# Altium PCB sdram_rev.PcbDoc
Units mm, origin at the board's own origin, x right, y up, seen from the top; angles counter-clockwise.
Board outline 29.59 x 50.8 mm, 2 copper layers (Top Layer, Bottom Layer); 10 components, 42 nets, 131 pads, 27 vias.
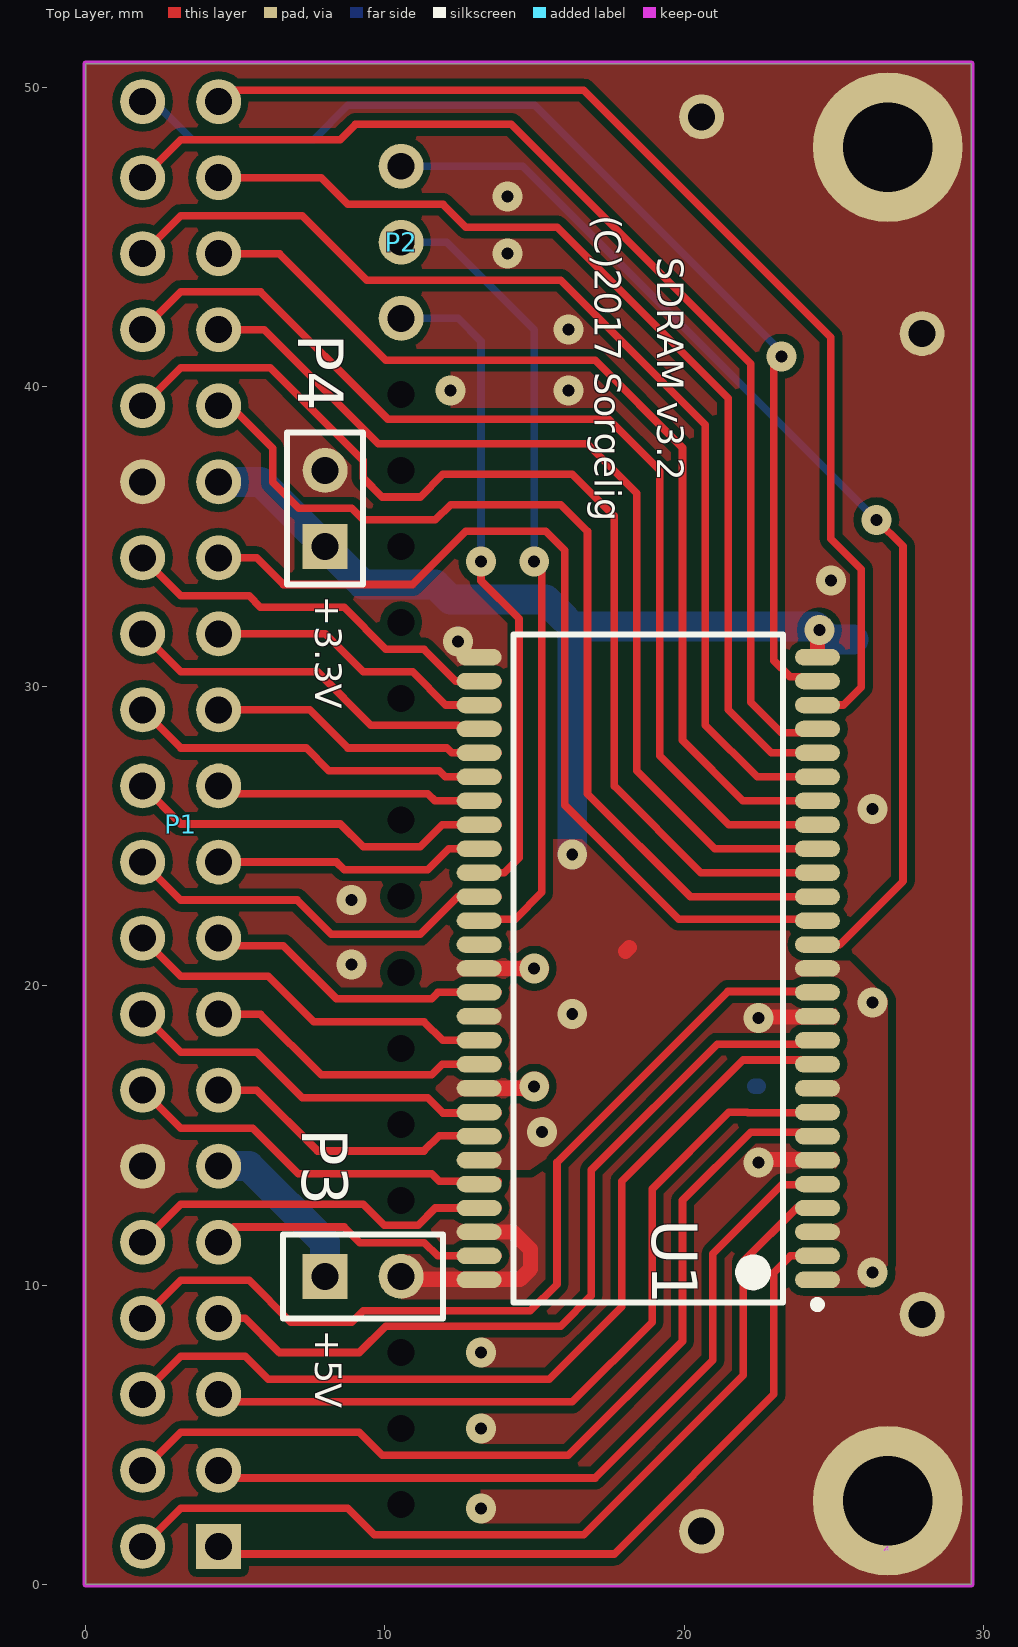
[diagram p0: Top Layer view]
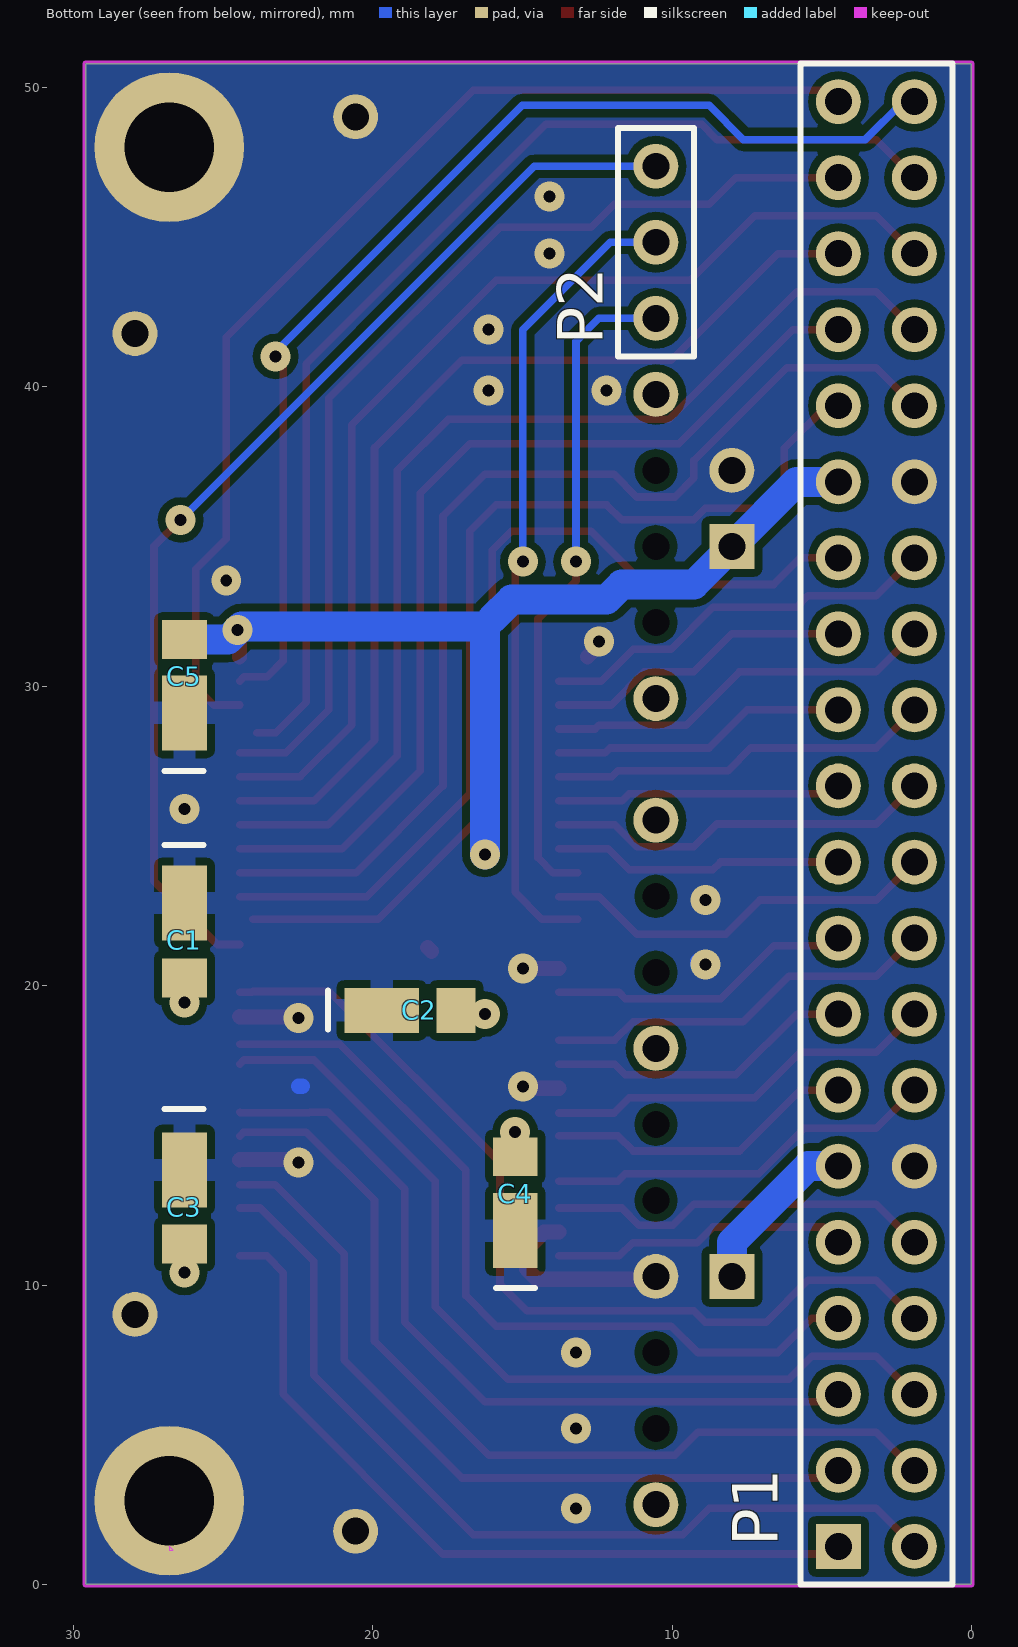
[diagram p1: Bottom Layer view, seen from below]

## Layer stack, top to bottom
Top Solder: solder mask 0.0102, Solder Resist, Dk 3.5
Top Layer: signal copper 0.0356
Dielectric 1: dielectric 0.32, FR-4, Dk 4.8
Bottom Layer: signal copper 0.0356
Bottom Solder: solder mask 0.0102, Solder Resist, Dk 3.5

## Board outline
0,50.8 0,0 29.591,0 29.591,50.8

## Design rules (kind name [scope] priority, off if disabled: settings)
BoardOutlineClearance [All] p1: gap=0 ignorepadtopadclearanceinfootprint=FALSE
Clearance keep-out_clearance [InNamedPolygon('ground') vs OnLayer('Keep-Out Layer')] p1: gap=0 ignorepadtopadclearanceinfootprint=FALSE
Clearance [All] p2: gap=0.254 ignorepadtopadclearanceinfootprint=TRUE except(0: Arc-Hole Track-Hole SMDPad-Hole THPad-Hole Via-Hole Fill-Hole Poly-Hole Region-Hole Text-Hole)
ComponentClearance [All] p1 off: gap=0.254 collisioncheckmode=3 verticalgap=0.254 showdistances=FALSE
Height [All] p1 off: minheight=0 maxheight=25.4 prefheight=12.7
HoleSize [All] p1: absolutevalues=TRUE maxlimit=6 minlimit=0.025 maxpercent=80.000 minpercent=20.000
MinimumSolderMaskSliver [All] p1: minsoldermaskwidth=0.25
PolygonConnect PolygonConnect_1 [HasFootprint('0805')] p1: connectstyle=Relief reliefconductorwidth=0.762 reliefentries=4 polygonreliefangle="90 Angle" airgapwidth=0.254
PolygonConnect [All] p2: connectstyle=Direct reliefconductorwidth=0.254 reliefentries=4 polygonreliefangle="90 Angle" airgapwidth=0.254
RoutingVias [All] p1: holewidth=0.4 width=1 viastyle="Through Hole" minholewidth=0.4 minwidth=1 maxholewidth=0.4 maxwidth=1
SilkToSolderMaskClearance [IsPad] p1: minsilkscreentomaskgap=0.127 clearancetoexposedcopper=TRUE
SolderMaskExpansion SolderMaskExpansion_U1 [InComponent('U1')] p1: expansion=0
SolderMaskExpansion [All] p2: expansion=0.051
Width Width_power [InNetClass('power')] p1: maxlimit=2 minlimit=0.254 preferedwidth=0.508 minimp=50.000000 maximp=50.000000 favimp=50.000000
Width Width_signal [All] p2: maxlimit=0.254 minlimit=0.254 preferedwidth=0.254
25 further rules are at their usual default settings.

## Classes and differential pairs
net class power: GND VCC VDD

## Components (designator, comment, footprint, x,y, rotation, side; value= is the part's Value field where it differs from the comment)
C1 "C0805" 0805#1 26.289,21.209 r270 bottom value=0.1uF
C2 "C0805" 0805#2 18.161,19.177 r180 bottom value=0.1uF
C3 "+" 0805#3 26.289,12.319 r270 bottom value=100uF
C4 "C0805" 0805#4 15.24,13.335 r90 bottom value=0.1uF
C5 "+" 0805#5 26.289,30.607 r90 bottom value=100uF
P1 "Header 20X2" HDR2X20 4.445,1.27 r90 top locked
P2 "Header 3" HDR1X3 10.541,42.291 r90 top locked
P3 "+5V" PIN1 8.001,10.287 r0 top locked
P4 "Header 2" HDR1X2 8.001,34.671 r90 top locked
U1 "AS4C16M16SA-6TCN" MICT-P-54_N 18.796,20.574 r180 top locked

## Footprints (in the part's own frame and the unit in brackets; to place one, negate y for a bottom-side part, rotate by r counter-clockwise, add the part's x,y. Pads: shape width x height; smd on the part's side, far side on the other; paste and mask are expansions set on the pad)
0805#1 [mm] "Chip Capacitor; Body 2.0 x 1.2 mm (LxW typ)"
  rect 2.5x1.5 smd: 1(-1.55,0)
  rect 1.3x1.5 smd: 2(0.95,0)
  silkscreen extent -3.49,-0.67 -3.49,0.64
0805#2 [mm] "Chip Capacitor; Body 2.0 x 1.2 mm (LxW typ)"
  rect 2.5x1.5 smd: 1(-1.535,0)
  rect 1.3x1.5 smd: 2(0.95,0)
  silkscreen extent -3.33,-0.63 -3.33,0.67
0805#3 [mm] "Chip Capacitor; Body 2.0 x 1.2 mm (LxW typ)"
  rect 2.5x1.5 smd: 1(-1.525,0)
  rect 1.3x1.5 smd: 2(0.95,0)
  silkscreen extent -3.56,-0.67 -3.56,0.64
0805#4 [mm] "Chip Capacitor; Body 2.0 x 1.2 mm (LxW typ)"
  rect 2.5x1.5 smd: 1(-1.516,0)
  rect 1.3x1.5 smd: 2(0.95,0)
  silkscreen extent -3.43,-0.67 -3.43,0.64
0805#5 [mm] "Chip Capacitor; Body 2.0 x 1.2 mm (LxW typ)"
  rect 2.5x1.5 smd: 1(-1.494,0)
  rect 1.3x1.5 smd: 2(0.95,0)
  silkscreen extent -3.43,-0.63 -3.43,0.67
HDR1X2 [mm] "Connector; Header; 2 Position"
  rect 1.5x1.5 hole 0.9: 1(0,0)
  round 1.5 hole 0.9: 2(2.54,0)
  silkscreen extent -1.27,-1.27 3.81,1.27
HDR1X3 [mm] "Connector; Header; 3 Position"
  round 1.5 hole 0.9: 1(0,0) 2(2.54,0) 3(5.08,0)
HDR2X20 [mm] "Connector; Header; 20x2 Position"
  rect 1.5x1.5 hole 0.9: 1(0,0)
  round 1.5 hole 0.9: 2(0,2.54) 3(2.54,0) 4(2.54,2.54) 5(5.08,0) 6(5.08,2.54) 7(7.62,0) 8(7.62,2.54) 9(10.16,0) 10(10.16,2.54) 11(12.7,0) 12(12.7,2.54) 13(15.24,0) 14(15.24,2.54) 15(17.78,0) 16(17.78,2.54) 17(20.32,0) 18(20.32,2.54) 19(22.86,0) 20(22.86,2.54) 21(25.4,0) 22(25.4,2.54) 23(27.94,0) 24(27.94,2.54) 25(30.48,0) 26(30.48,2.54) 27(33.02,0) 28(33.02,2.54) 29(35.56,0) 30(35.56,2.54) 31(38.1,0) 32(38.1,2.54) 33(40.64,0) 34(40.64,2.54) 35(43.18,0) 36(43.18,2.54) 37(45.72,0) 38(45.72,2.54) 39(48.26,0) 40(48.26,2.54)
MICT-P-54_N [mm] "SOP, 54-Leads, Body 22.3x10.2mm, Pitch 0.8mm, IPC Medium Density"
  oval 1.5x0.55 smd: 1(-5.65,10.4) 2(-5.65,9.6) 3(-5.65,8.8) 4(-5.65,8) 5(-5.65,7.2) 6(-5.65,6.4) 7(-5.65,5.6) 8(-5.65,4.8) 9(-5.65,4) 10(-5.65,3.2) 11(-5.65,2.4) 12(-5.65,1.6) 13(-5.65,0.8) 14(-5.65,0) 15(-5.65,-0.8) 16(-5.65,-1.6) 17(-5.65,-2.4) 18(-5.65,-3.2) 19(-5.65,-4) 20(-5.65,-4.8) 21(-5.65,-5.6) 22(-5.65,-6.4) 23(-5.65,-7.2) 24(-5.65,-8) 25(-5.65,-8.8) 26(-5.65,-9.6) 27(-5.65,-10.4) 28(5.65,-10.4) 29(5.65,-9.6) 30(5.65,-8.8) 31(5.65,-8) 32(5.65,-7.2) 33(5.65,-6.4) 34(5.65,-5.6) 35(5.65,-4.8) 36(5.65,-4) 37(5.65,-3.2) 38(5.65,-2.4) 39(5.65,-1.6) 40(5.65,-0.8) 41(5.65,0) 42(5.65,0.8) 43(5.65,1.6) 44(5.65,2.4) 45(5.65,3.2) 46(5.65,4) 47(5.65,4.8) 48(5.65,5.6) 49(5.65,6.4) 50(5.65,7.2) 51(5.65,8) 52(5.65,8.8) 53(5.65,9.6) 54(5.65,10.4)
  silkscreen extent -5.77,-11.15 4.5,11.35, body extent -5.1,-11.15 5.1,11.15, height 1.2
PIN1 [mm] "Connector; Plug"
  rect 1.5x1.5 hole 0.9: 1(0,0)
  silkscreen extent -1.4,-1.4 3.94,1.4

## Part data
C1 C2 C4: "Ceramic Chip Capacitor - Standard", PackageDocument=Mar-2001, Code_IPC=2012[0805], Code_JEITA=0805, ComponentLink1Description="Manufacturer Link", ComponentLink1URL=http://www.kemet.com/, ComponentLink2Description=Datasheet, ComponentLink2URL=http://www.kemet.com/kemet/web/homepage/kechome.nsf/vapubfilesname/F3102TA.pdf/$file/F3102TA.pdf, DatasheetDocument=Mar-2001, LatestRevisionDate=19-Mar-2004, LatestRevisionNote="Silkscreen size reduced.", Note="Footprint corresponds to dimensions for bulk cassette packaging. This case size has tightened tolerances.", PackageReference=0805, Published=17-Jul-2002, Publisher="Altium Limited"
C3 C5: library part C0805, "Ceramic Chip Capacitor - Standard", PackageDocument=Mar-2001, Code_IPC=2012[0805], Code_JEITA=0805, ComponentLink1Description="Manufacturer Link", ComponentLink1URL=http://www.kemet.com/, ComponentLink2Description=Datasheet, ComponentLink2URL=http://www.kemet.com/kemet/web/homepage/kechome.nsf/vapubfilesname/F3102TA.pdf/$file/F3102TA.pdf, DatasheetDocument=Mar-2001, LatestRevisionDate=19-Mar-2004, LatestRevisionNote="Silkscreen size reduced.", Note="Footprint corresponds to dimensions for bulk cassette packaging. This case size has tightened tolerances.", PackageReference=0805, Published=17-Jul-2002, Publisher="Altium Limited"
P1: "Header, 20-Pin, Dual row", LatestRevisionDate=17-Jul-2002, LatestRevisionNote="Re-released for DXP Platform.", Publisher="Altium Limited"
P2: "Header, 3-Pin", LatestRevisionDate=17-Jul-2002, LatestRevisionNote="Re-released for DXP Platform.", Publisher="Altium Limited"
P3: library part Plug, "Plug", LatestRevisionDate=17-Jul-2002, LatestRevisionNote="Re-released for DXP Platform.", Publisher="Altium Limited"
P4: "Header, 2-Pin", LatestRevisionDate=17-Jul-2002, LatestRevisionNote="Re-released for DXP Platform.", Publisher="Altium Limited"
U1: library part MT48LC16M16A2P-6A, "256Mb PC133 SDR SDRAM, 16Mb x 16, 6ns, 3.3V, 0 to 70 degC, 54-Pin TSOP, Pb-Free", Manufacturer=Micron, Op. Temp.="0C to +70C", Voltage=3.3V, CL="CL = 3", Clock Rate="167 MHz", ComponentLink1Description="Manufacturer URL", ComponentLink1URL=http://www.micron.com/, ComponentLink2Description=Datasheet, ComponentLink2URL=http://www.micron.com/~/media/Documents/Products/Data%20Sheet/DRAM/256Mb_sdr.pdf, ComponentLink3Description="Package Specification", ComponentLink3URL=http://www.micron.com/~/media/Documents/Products/Data%20Sheet/DRAM/128mb_x4x8x16_sdram.pdf, Cycle Time=6ns, Data Rate=PC133, DatasheetVersion=Rev.Q, Density=256Mb, Depth=16Mb, Mounting Technology="Surface Mount", PackageDescription="54-Pin Thin Small Outline Package, 10.16 x 22.22 mm, Pitch 0.8 mm", PackageReference=MICT-P-54, PackageVersion=Rev.Q, PartNumber=MT48LC16M16A2P-6A, RoHS=Yes, Width=x16

## Free pads (board coordinates)
  round 1.5 hole 0.9: 8(27.94,9.017) ""(10.541,10.287) ""(20.574,1.778) ""(20.574,49.022) ""(27.94,41.783)
  round 0 / inner round 0 / far side round 1.5 hole 0.9 mask-0.9: ""(10.541,2.667) ""(10.541,17.907) ""(10.541,25.527) ""(10.541,39.751)
  round 0 hole 0.9 unplated mask-0.9: ""(10.541,5.207) ""(10.541,7.747) ""(10.541,12.827) ""(10.541,15.367) ""(10.541,20.447) ""(10.541,22.987) ""(10.541,32.131) ""(10.541,34.671) ""(10.541,37.211)
  round 0 / inner round 1.5 / far side round 1.5 hole 0.9 mask-0.9: ""(10.541,29.591)
  round 5 hole 3: ""(26.797,2.794) ""(26.797,48.006)

## Via types
v1: diameter 1, hole 0.4, Top Layer to Bottom Layer, tented both sides, 27 vias

## Nets (pads, with @x,y where several pads share a name; then routed paths per layer and width w, separated by ;. In a path a pad name is that pad's centre, name@x,y a point inside that pad or via, vN(x,y) a via of type N, cw(c..) or ccw(c..) an arc to the next point about the centre after c; other vN are vias at no path point)
A0: P1.37 U1.23 | length 34.1
  Top Layer w0.254: P1.37 7.874,46.99 8.763,46.101 11.938,46.101 12.7,45.339 15.748,45.339 21.463,39.624 21.463,29.21 22.899,27.774 U1.23
A1: P1.38 U1.24 | length 37.7
  Top Layer w0.254: P1.38 3.175,48.26 8.509,48.26 9.017,48.768 14.224,48.768 22.225,40.767 22.225,29.464 23.241,28.448 U1.24@23.876,28.448
A2: P1.39 U1.25 | length 37.8
  Top Layer w0.254: P1.39 4.826,49.911 16.637,49.911 24.892,41.656 24.892,34.925 25.908,33.909 25.908,29.972 25.31,29.374 U1.25
A3: P1.40 U1.26 | length 37.6
  Top Layer w0.254: v1@22.987,40.64 22.987,30.861 23.53,30.318 24.302,30.318 U1.26
  Bottom Layer w0.254: P1.40 2.286,49.53 3.556,48.26 7.62,48.26 8.763,49.403 15.009,49.403 23.391,41.021 v1(23.241,41.021)
A4: P1.28 U1.29 | length 13.6
  Top Layer w0.254: P1.28 3.175,33.02 5.461,33.02 5.842,32.639 8.636,32.639 10.033,31.242 11.303,31.242 12.371,30.174 U1.29 U1.29@13.781,30.174
A5: P1.25 U1.30 | length 10.3
  Top Layer w0.254: P1.25 8.001,31.75 9.271,30.48 10.922,30.48 12.028,29.374 U1.30 U1.30@13.781,29.374
A6: P1.26 U1.31 | length 13.2
  Top Layer w0.254: P1.26 3.175,30.48 7.747,30.48 9.525,28.702 12.446,28.702 12.574,28.574 U1.31 U1.31@13.781,28.574
A7: P1.23 U1.32 | length 9.9
  Top Layer w0.254: P1.23 7.493,29.21 8.763,27.94 12.065,27.94 12.231,27.774 U1.32 U1.32@13.781,27.774
A8: P1.24 U1.33 | length 12.8
  Top Layer w0.254: P1.24 3.175,27.94 7.366,27.94 8.128,27.178 11.811,27.178 12.015,26.974 U1.33 U1.33@13.781,26.974
A9: P1.21 U1.34 | length 9.5
  Top Layer w0.254: P1.21 4.699,26.416 11.43,26.416 11.672,26.174 U1.34 U1.34@13.781,26.174
A10: P1.36 U1.22 | length 36.7
  Top Layer w0.254: P1.36 3.175,45.72 7.239,45.72 9.398,43.561 15.875,43.561 20.701,38.735 20.701,28.702 22.429,26.974 U1.22
A11: P1.22 U1.35 | length 13
  Top Layer w0.254: P1.22 3.175,25.4 8.509,25.4 9.271,24.638 11.176,24.638 11.912,25.374 U1.35 U1.35@13.781,25.374
A12: P1.19 U1.36 | length 9.7
  Top Layer w0.254: P1.19 8.382,24.13 8.636,23.876 11.43,23.876 12.128,24.574 U1.36 U1.36@13.781,24.574
BA0: P1.34 U1.20 | length 36
  Top Layer w0.254: P1.34 3.175,43.18 5.842,43.18 10.102,38.92 17.468,38.92 19.177,37.211 19.177,27.686 21.489,25.374 U1.20
BA1: P1.35 U1.21 | length 33.3
  Top Layer w0.254: P1.35 6.477,44.45 10.033,40.894 17.018,40.894 19.939,37.973 19.939,28.194 21.959,26.174 U1.21
CAS: P1.31 U1.17 | length 33
  Top Layer w0.254: P1.31 4.826,39.37 6.249,37.947 6.249,36.814 7.122,35.941 8.89,35.941 9.271,35.56 11.684,35.56 12.192,36.068 15.875,36.068 16.764,35.179 16.764,26.416 20.206,22.974 U1.17
CKE: P2.1 U1.37 | length 22.3
  Top Layer w0.254: U1.37 13.984,23.774 14.478,24.268 14.478,32.258 13.208,33.528 v1(13.208,34.163)
  Bottom Layer w0.254: P2.1 12.446,42.291 13.208,41.529 v1(13.208,34.163)
CLK: P1.20 U1.38 | length 13.4
  Top Layer w0.254: P1.20 3.175,22.86 7.071,22.86 8.214,21.717 11.176,21.717 12.433,22.974 U1.38 U1.38@13.781,22.974
CS: P1.33 U1.19 | length 32.6
  Top Layer w0.254: P1.33 5.969,41.91 9.779,38.1 16.764,38.1 18.415,36.449 18.415,27.178 21.019,24.574 U1.19
DH: P2.2 U1.39 | length 27
  Top Layer w0.254: U1.39@13.146,22.225 14.351,22.225 15.24,23.114 15.24,33.909 v1(14.986,34.163)
  Bottom Layer w0.254: P2.2 12.065,44.831 14.986,41.91 v1(14.986,34.163)
DL: P2.3 U1.15 | length 36.9
  Top Layer w0.254: U1.15 25.184,21.374 27.305,23.495 27.305,34.671 v1(26.416,35.56)
  Bottom Layer w0.254: P2.3 14.605,47.371 v1(26.416,35.56)
DQ0: P1.1 U1.2 | length 26.6
  Top Layer w0.254: P1.1 4.699,1.016 17.653,1.016 22.987,6.35 22.987,10.414 23.547,10.974 U1.2
DQ1: P1.2 U1.4 | length 30.2
  Top Layer w0.254: P1.2 3.175,2.54 8.763,2.54 9.644,1.659 16.645,1.659 21.971,6.985 21.971,10.795 23.75,12.574 U1.4
DQ2: P1.3 U1.5 | length 26.2
  Top Layer w0.254: P1.3 4.699,3.556 17.018,3.556 20.955,7.493 20.955,11.049 22.239,12.333 23.251,13.345 U1.5@24.446,13.345
DQ3: P1.4 U1.7 | length 30.7
  Top Layer w0.254: P1.4 3.175,5.08 9.144,5.08 9.906,4.318 16.129,4.318 19.939,8.128 19.939,12.827 22.217,15.105 24.315,15.105 U1.7
DQ4: P1.5 U1.8 | length 26.7
  Top Layer w0.254: P1.5 4.699,6.096 16.256,6.096 18.923,8.763 18.923,13.208 21.489,15.774 22.096,15.774 22.114,15.756 24.428,15.756 U1.8
DQ5: P1.6 U1.10 | length 30.3
  Top Layer w0.254: P1.6 3.175,7.62 5.334,7.62 6.096,6.858 15.494,6.858 17.907,9.271 17.907,13.462 21.963,17.518 24.302,17.518 U1.10
DQ6: P1.7 U1.11 | length 27.2
  Top Layer w0.254: P1.7 5.334,8.89 6.477,7.747 9.144,7.747 10.025,8.628 15.867,8.628 16.891,9.652 16.891,13.843 21.095,18.047 22.109,18.047 22.114,18.042 22.844,18.042 22.849,18.047 U1.11@24.446,18.047
DQ7: P1.8 U1.13 | length 30.6
  Top Layer w0.254: P1.8 3.175,10.16 5.461,10.16 6.858,8.763 8.89,8.763 9.271,9.144 14.859,9.144 15.748,10.033 15.748,14.097 21.455,19.804 24.003,19.804 24.033,19.774 U1.13
DQ8: P1.17 U1.42 | length 10.3
  Top Layer w0.254: P1.17 4.699,21.336 6.604,21.336 8.382,19.558 11.557,19.558 11.773,19.774 U1.42 U1.42@13.781,19.774
DQ9: P1.18 U1.44 | length 13.3
  Top Layer w0.254: P1.18 3.175,20.32 6.096,20.32 7.62,18.796 11.303,18.796 11.925,18.174 U1.44 U1.44@13.781,18.174
DQ10: P1.15 U1.45 | length 10.3
  Top Layer w0.254: P1.15 5.842,19.05 7.874,17.018 11.557,17.018 11.913,17.374 U1.45 U1.45@13.781,17.374
DQ11: P1.16 U1.47 | length 13.2
  Top Layer w0.254: P1.16 3.175,17.78 5.715,17.78 7.239,16.256 11.43,16.256 11.938,15.748 U1.47@13.781,15.748
DQ12: P1.13 U1.48 | length 10.4
  Top Layer w0.254: P1.13 5.715,16.51 7.747,14.478 11.303,14.478 11.811,14.986 U1.48@13.781,14.986
DQ13: P1.14 U1.50 | length 13.1
  Top Layer w0.254: P1.14 3.175,15.24 5.588,15.24 7.112,13.716 11.557,13.716 11.811,13.462 U1.50@13.781,13.462
DQ14: P1.10 U1.51 | length 12.9
  Top Layer w0.254: P1.10 3.175,12.7 9.271,12.7 9.975,11.996 11.107,11.996 11.685,12.574 U1.51 U1.51@13.781,12.574
DQ15: P1.9 U1.53 | length 9.9
  Top Layer w0.254: P1.9 4.953,11.938 8.636,11.938 9.156,11.418 11.315,11.418 11.759,10.974 U1.53 U1.53@13.781,10.974
GND: C1.1 C2.1 C3.1 C4.1 C5.1 P1.12 P1.30 P4.2 pad.8 pad.@10.541,10.287 pad.@20.574,1.778 pad.@20.574,49.022 pad.@26.797,2.794 pad.@26.797,48.006 pad.@27.94,41.783 U1.6 U1.12 U1.28 U1.41 U1.46 U1.52 U1.54 | length 14
  Top Layer w0.508: pad.@10.541,10.287 10.541,10.191 14.509,10.191 14.859,10.541 14.859,11.194 14.279,11.774 U1.52@13.781,11.774 ; v1@12.446,31.75 v1(12.446,31.496) 12.446,31.369 U1.28@12.827,30.988 ; U1.46@13.781,16.574 14.923,16.574 v1(14.986,16.637) ; U1.41@13.781,20.574 v1(14.986,20.574) ; v1(22.479,18.923) 22.513,18.957 24.429,18.957 U1.12 ; v1@22.606,14.224 22.639,14.191 24.429,14.191 U1.6
  Bottom Layer w0.508: v1@9.144,20.701 v1@9.144,20.828 ; 22.352,16.637 22.479,16.637
  other v1: 13.208,2.54 13.208,5.207 13.208,7.747 22.479,14.097 8.89,20.701 8.89,22.86 26.289,25.908 24.892,33.528 12.192,39.878 16.129,39.878 16.129,41.91 14.097,44.45 14.097,46.355
RAS: P1.32 U1.18 | length 36.3
  Top Layer w0.254: P1.32 3.175,40.64 6.171,40.64 7.404,39.408 9.271,37.54 9.271,36.957 9.906,36.322 11.176,36.322 11.938,37.084 16.256,37.084 17.653,35.687 17.653,26.67 20.549,23.774 U1.18
VCC: C1.2 C2.2 C3.2 C4.2 C5.2 P1.29 P4.1 U1.1 U1.3 U1.9 U1.14 U1.27 U1.43 U1.49 | length 31.9
  Top Layer w0.508: 18.034,21.15 18.161,21.277 ; U1.27 24.446,31.688 24.384,31.75 v1@24.652,31.75
  Bottom Layer w1: P1.29 5.842,36.83 P4.1 9.271,33.401 11.684,33.401 12.192,32.893 15.367,32.893 16.002,32.258 ; v1(16.256,24.384) 16.256,32.004 24.384,32.004 v1(24.511,31.877) 24.831,31.557 C5.2@25.654,31.557
  other v1: 26.289,10.414 15.24,15.113 16.256,19.05 26.289,19.431
VDD: P1.11 P3.1 | length 5.8
  Bottom Layer w1: P1.11 5.461,13.97 8.001,11.43 P3.1
WE: P1.27 U1.16 | length 31
  Top Layer w0.254: P1.27 5.715,34.29 6.604,33.401 10.922,33.401 12.7,35.179 15.367,35.179 16.002,34.544 16.002,26.035 19.812,22.225 U1.16@24.003,22.225
pads on no net: U1.40

## Polygon pours and split planes (outlines as drawn)
GND on Top Layer "ground" (solid, remove dead copper, pour order 18): 0,0 29.591,0 29.591,50.8 0,50.8
VCC on Top Layer "power" (solid, remove dead copper, pour order 14): 24.257,9.906 24.257,10.541 24.892,10.541 24.892,20.828 25.527,20.828 26.797,19.558 26.797,10.668 26.035,9.906
VCC on Top Layer "power" (solid, remove dead copper, pour order 10): 13.178,13.843 14.859,13.843 21.18,18.318 24.507,18.318 24.507,24.892 13.178,24.892
GND on Top Layer "ground" (solid, remove dead copper, pour order 16): 4.445,26.289 13.843,26.289 13.843,19.558 5.334,19.558 4.445,20.447
GND on Bottom Layer "ground" (solid, remove dead copper, pour order 8): 0,50.807 29.591,50.79 29.591,0 0,0

## Keep-outs
Keep-Out Layer:
  pour cut-out: 26.67,1.143 26.797,1.27 26.797,1.143
  lines w0.1: -0.05,0 ccw(c0,0) 0,-0.05 ; -0.05,0 ccw(c0,0) 0,-0.05 ; -0.05,0 -0.05,50.8 ; -0.05,50.8 cw(c0,50.8) 0,50.85 ; -0.05,50.8 cw(c0,50.8) 0,50.85 ; 0,-0.05 29.591,-0.05 ; 0,50.85 29.591,50.85 ; 29.591,-0.05 ccw(c29.591,0) 29.641,0 ; 29.591,-0.05 ccw(c29.591,0) 29.641,0 ; 29.591,50.85 cw(c29.591,50.8) 29.641,50.8 ; 29.591,50.85 cw(c29.591,50.8) 29.641,50.8 ; 29.641,0 29.641,50.8

## Other copper
Top Layer:
  pour cut-out: 10.541,8.509 13.208,8.509 13.208,1.778 10.541,1.778
  pour cut-out: 10.541,40.767 10.668,40.64 12.192,40.64 12.192,38.92 12.134,38.862 10.541,38.862
  pour cut-out: 8.763,11.049 10.541,11.049 10.541,9.525 8.763,9.525

## Silkscreen, mask and mechanical layers (free items; w line width, h text height)
Top Overlay:
  text "(C)2017 Sorgelig" at 16.715,45.727 h1.52 r270
  text "SDRAM v3.2" at 18.796,44.323 h1.52 r270
  text "+3.3V" at 7.366,33.02 h1.52 r270
  text "+5V" at 7.366,8.509 h1.52 r270